# Altium PCB pressure_stm_pcb.PcbDoc
Units mm, origin at the board's own origin, x right, y up, seen from the top; angles counter-clockwise.
Board outline 28 x 28 mm, 2 copper layers (Top Layer, Bottom Layer); 28 components, 22 nets, 96 pads, 0 vias.
Unrouted connection lines stored in the file: 60.
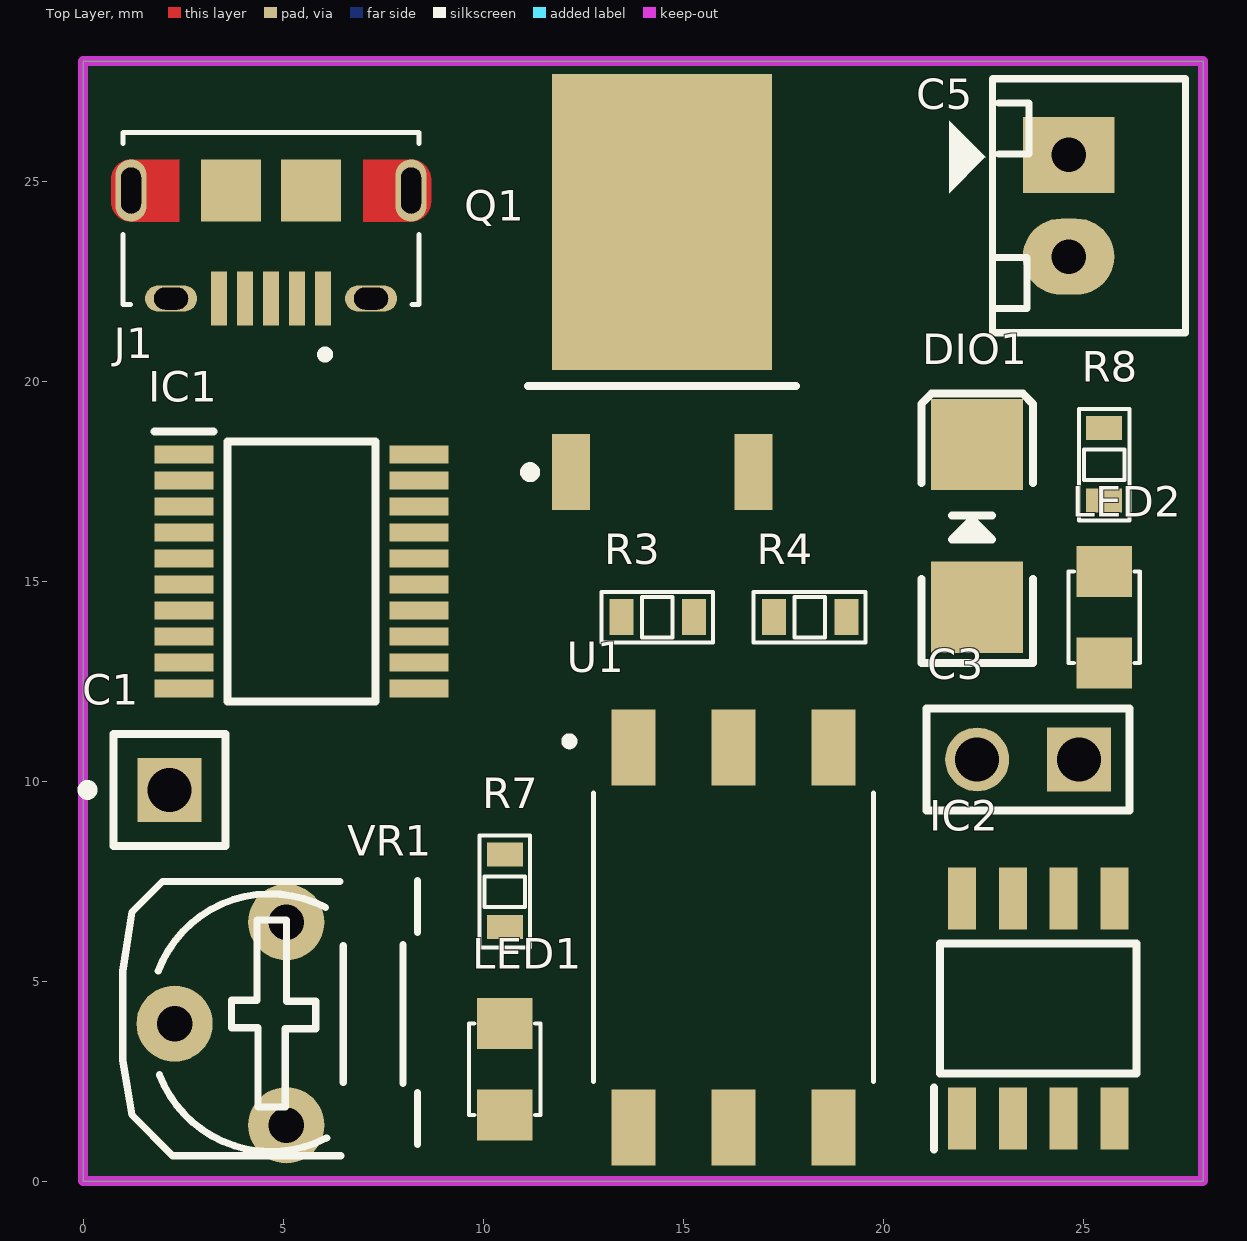
[diagram p0: Top Layer view]
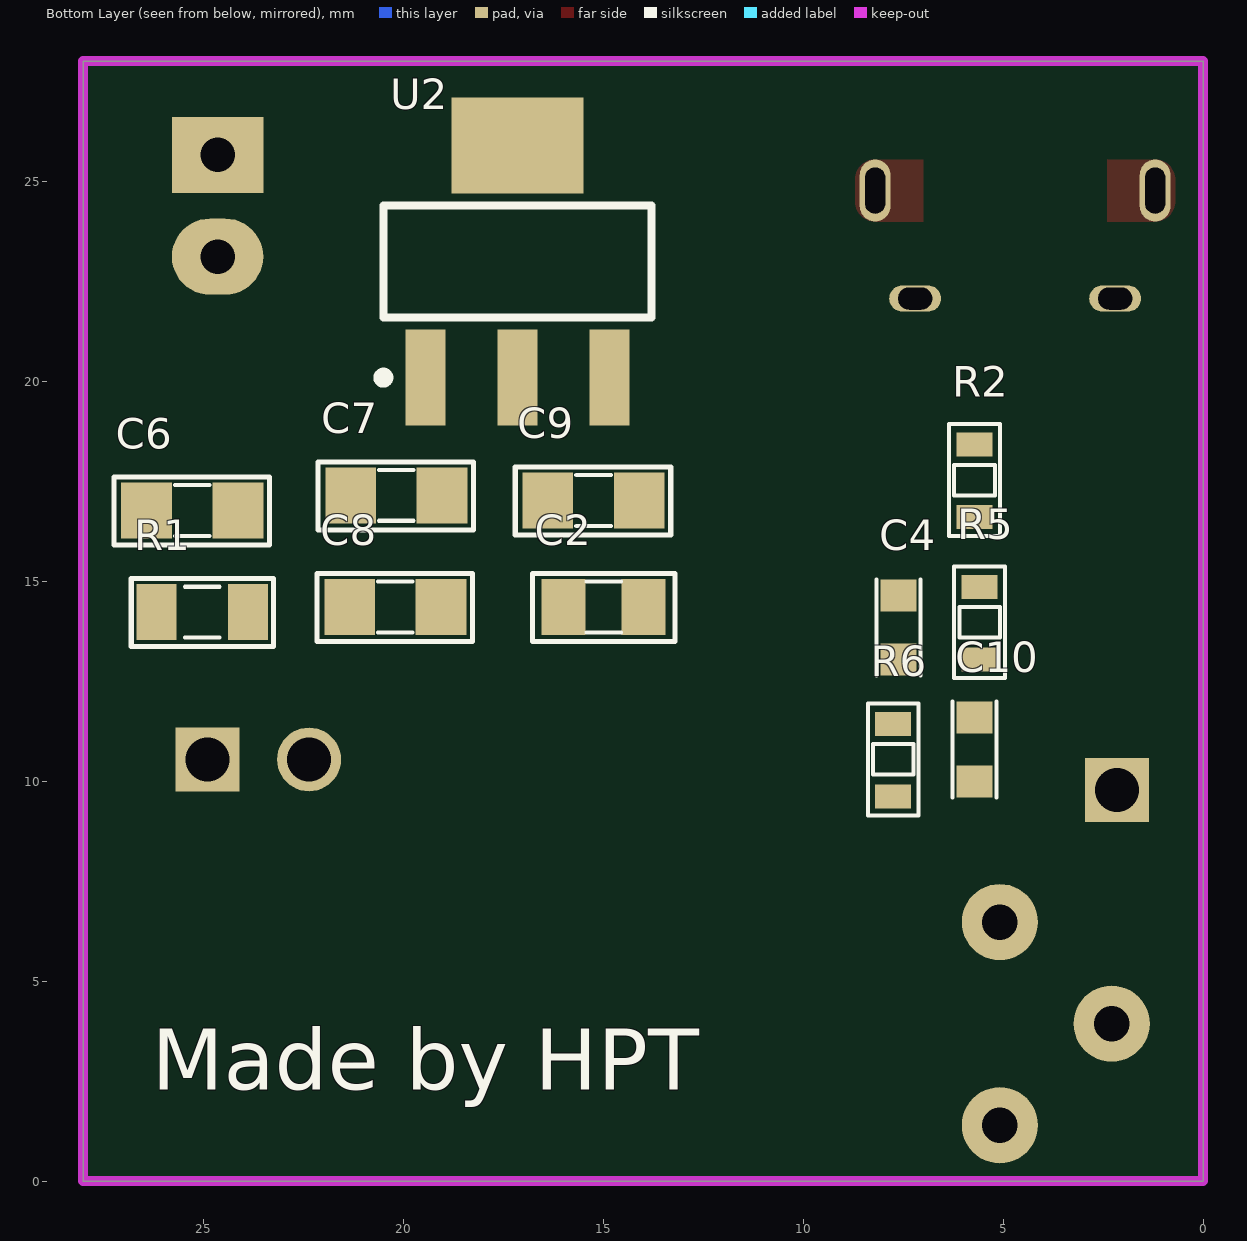
[diagram p1: Bottom Layer view, seen from below]

## Layer stack, top to bottom
Top Solder: solder mask 0.0102, Solder Resist, Dk 3.5
Top Layer: signal copper 0.0356
Dielectric 1: dielectric 0.32, FR-4, Dk 4.8
Bottom Layer: signal copper 0.0356
Bottom Solder: solder mask 0.0102, Solder Resist, Dk 3.5

## Board outline
0,0 28,0 28,28 0,28

## Design rules (kind name [scope] priority, off if disabled: settings)
Clearance [All] p1: gap=0.254
PolygonConnect [All] p1: connectstyle=Relief reliefconductorwidth=0.254 reliefentries=4 polygonreliefangle="90 Angle" airgapwidth=0.254
RoomDefinition pressure_stm_schematic [InComponentClass('pressure_stm_schematic')] p1: confinementstyle=ConfineIn formatcopy=TRUE lockcomponents=FALSE outline 31.75,-1.397 165.862,-1.397 165.862,13.589 31.75,13.589
RoutingVias [All] p1: holewidth=0.711 width=1.27 viastyle="Through Hole" minholewidth=0.711 minwidth=1.27 maxholewidth=0.711 maxwidth=1.27
SolderMaskExpansion [All] p1: expansion=0.102
Width [All] p1: maxlimit=0.254 minlimit=0.254 preferedwidth=0.254
30 further rules are at their usual default settings.

## Components (designator, comment, footprint, x,y, rotation, side; value= is the part's Value field where it differs from the comment)
C1 "JP1" JP1-D1T 2.159,9.779 r90 top
C2 "1uF" CN-SMD-0805 14.986,14.351 r180 bottom
C3 "JP2" JP2-D1T 24.892,10.541 r180 top
C4 "Capacitor SMD" CAP_0603 7.62,13.843 r270 bottom
C5 "Header2" Header2 24.638,25.654 r270 top
C6 "104" SM-CAP-0805 26.416,16.764 r180 bottom
C7 "104" SM-CAP-0805 21.311,17.145 r180 bottom
C8 "104" SM-CAP-0805 21.336,14.351 r180 bottom
C9 "104" SM-CAP-0805 16.383,17.018 r180 bottom
C10 "Capacitor SMD" CAP_0603 5.715,10.795 r270 bottom
DIO1 "Diode SMD" DIO-SMD-106 22.352,16.383 r270 top
IC1 "STM8S103F3P6BTR" SOP65P640X120-20N 5.461,15.24 r0 top
IC2 "TM7711" SOIC127P600X196-8N 23.876,4.318 r90 top
J1 "10118194-0001LF" AMPHENOL_10118194-0001LF 4.699,24.765 r180 top
LED1 "LED" LED-0805-Blue 10.541,1.651 r90 top
LED2 "LED" LED-0805-Blue 25.527,12.954 r90 top
Q1 "IRFR3910" TO-252AA_N 14.478,22.225 r90 top
R1 "10K" RES-SMD-0805 25.019,14.224 r180 bottom
R2 "1K" RES-SMD-0603 5.715,17.526 r270 bottom
R3 "1K" RES-SMD-0603 14.351,14.097 r0 top
R4 "10K" RES-SMD-0603 18.161,14.097 r0 top
R5 "100" RES-SMD-0603 5.588,13.97 r270 bottom
R6 "100" RES-SMD-0603 7.747,10.541 r270 bottom
R7 "1K" RES-SMD-0603 10.541,7.239 r90 top
R8 "1K" RES-SMD-0603 25.527,17.907 r90 top
U1 "MPS20N0040D-D" XDCR_ADP5241 16.256,6.096 r0 top
U2 "LM1117-5V" SOT223 17.145,22.987 r180 bottom
VR1 "10K" VR 5.08,1.397 r90 top

## Footprints (in the part's own frame and the unit in brackets; to place one, negate y for a bottom-side part, rotate by r counter-clockwise, add the part's x,y. Pads: shape width x height; smd on the part's side, far side on the other; paste and mask are expansions set on the pad)
AMPHENOL_10118194-0001LF [mm]
  rect 0.4x1.35 smd: 1(-1.3,2.7) 2(-0.65,2.7) 3(0,2.7) 4(0.65,2.7) 5(1.3,2.7)
  oval 1.3x0.65 hole 0.55 slot 0.85 at 0 deg: S1(-2.5,2.7) S2(2.5,2.7)
  oval 0.775x1.55 hole 0.5 slot 1.15 at 90 deg: S3(-3.5,0) S6(3.5,0)
  rect 1.5x1.55 smd: S4(-1,0) S5(1,0)
  Top Layer region: 193 vertices and 0 holes, not listed, extent -4,-0.775 -2.3,0.78
  Top Layer region: 193 vertices and 0 holes, not listed, extent 2.3,-0.78 4,0.775
  silkscreen extent -3.7,-1.45 3.7,4.2, body extent -3.99,-2.67 4.06,2.91, height 3.12
CAP_0603 [mm]
  rect 0.8x0.9 smd: 1(-0.8,0) 2(0.8,0)
  silkscreen extent -1.2,-0.55 1.2,0.55, body extent -0.8,-0.4 0.8,0.4, height 0.9
CN-SMD-0805 [mm]
  rect 1.1x1.397 smd: 1(-1,0) 2(1,0)
  silkscreen extent -1.78,-0.86 1.78,0.84, body extent -1,-0.62 1,0.63, height 0.8
DIO-SMD-106 [mil]
  rect 90x90.55 smd: 1(80,0) 2(-80,0)
  silkscreen extent -130,-55 135,55, body extent -99,-50 106,52, height 95
Header2 [mil] "CON2"
  rect 75x90 hole 34: 1(0,0)
  oval 75x90 hole 34: 2(100,0)
  silkscreen extent -75,-118 175,115, body extent -68,-70 168,107, height 236
JP1-D1T [mm] "1pins, 1 row, straight, gold plating"
  rect 1.6x1.6 hole 1.1: 1(0,0)
  silkscreen extent -1.4,-1.4 1.4,2.17
JP2-D1T [mm] "2 pins, 1 row, straight, gold plating"
  rect 1.6x1.6 hole 1.1: 1(0,0)
  round 1.6 hole 1.1: 2(2.54,0)
  silkscreen extent -1.27,-1.27 3.81,1.27, body extent -1.27,-1.27 3.81,1.27, height 8.54
LED-0805-Blue [mil]
  rect 50x55 smd: 1(0,0) 2(90,0)
  silkscreen extent 0,-35 90,35, body extent 5,-25 85,25, height 43
RES-SMD-0603 [mm]
  rect 0.6x0.9 smd: 1(-0.889,0) 2(0.927,0)
  silkscreen extent -1.4,-0.64 1.4,0.64, body extent -0.8,-0.4 0.8,0.4, height 0.43
RES-SMD-0805 [mil]
  rect 39.37x55 smd: 1(-45,0) 2(45,0)
  silkscreen extent -70,-34 70,33, body extent -39,-25 39,25, height 31
SM-CAP-0805 [mil]
  rect 50x55 smd: 1(0,0) 2(90,0)
  silkscreen extent -32,-34 121,33, body extent 6,-25 84,25, height 31
SOIC127P600X196-8N [mm]
  rect 1.55x0.7 smd: 1(-2.75,1.905) 2(-2.75,0.635) 3(-2.75,-0.635) 4(-2.75,-1.905) 5(2.75,-1.905) 6(2.75,-0.635) 7(2.75,0.635) 8(2.75,1.905)
  silkscreen extent -3.52,-2.46 1.63,2.61, body extent -3,-2.46 3,2.46, height 1.96
SOP65P640X120-20N [mm]
  rect 1.475x0.45 smd: 1(-2.938,2.925) 2(-2.938,2.275) 3(-2.938,1.625) 4(-2.938,0.975) 5(-2.938,0.325) 6(-2.938,-0.325) 7(-2.938,-0.975) 8(-2.938,-1.625) 9(-2.938,-2.275) 10(-2.938,-2.925) 11(2.938,-2.925) 12(2.938,-2.275) 13(2.938,-1.625) 14(2.938,-0.975) 15(2.938,-0.325) 16(2.938,0.325) 17(2.938,0.975) 18(2.938,1.625) 19(2.938,2.275) 20(2.938,2.925)
  silkscreen extent -3.67,-3.25 1.85,3.5, body extent -3.2,-3.25 3.2,3.25, height 1.2
SOT223 [mm]
  rect 1x2.4 smd: 1(-2.3,-2.9) 2(0,-2.9) 3(2.3,-2.9)
  rect 3.3x2.4 smd: 4(0,2.9)
  silkscreen extent -3.48,-3.02 3.35,1.4, body extent -3.25,-3.56 3.25,3.4, height 1.68
TO-252AA_N [mm] "D-PAK, 4-Leads, Body 6.1x6.5mm, Pitch 2.28mm, Lead Span 9.9mm, IPC Medium Density"
  rect 1.9x0.95 smd: 1(-4.5,2.28) 3(-4.5,-2.28)
  rect 7.4x5.5 smd: 4(1.75,0)
  silkscreen extent -4.62,-3.35 -2.35,3.43, body extent -2.25,-3.37 4.1,3.37, height 2.38
VR [mil] "Resistor Variable"
  round 75 hole 35: 1(0,0) 2(100,110) 3(200,0)
  silkscreen extent -30,-129 241,161, body extent -30,-135 230,140, height 177
XDCR_ADP5241 [mm]
  rect 1.1x1.9 smd: 1(-2.5,4.75) 2(0,4.75) 3(2.5,4.75) 4(2.5,-4.75) 5(0,-4.75) 6(-2.5,-4.75)
  silkscreen extent -4.2,-3.6 3.5,5, body extent -3.5,-5 3.5,5, height 6.8

## Part data
C1 C3: "WR-PHD 2.54 mm Angled Socket Header"
C2 C6 C7 C8 C9: library part CN
C5: "Header IDC, 2 x 1 Pin Vertical 2.54mm Pitch (Non-Boxed, Male)"
DIO1: "Default Diode"
IC1 IC2: "Integrated Circuit"
J1: "USB - micro B USB 2.0 Receptacle Connector 5 Position Surface Mount, Right Angle; Through Hole"
LED1 LED2: library part "LED SMD"
Q1: "HEXFET Power MOSFET"
R1 R2 R3 R4 R5 R6 R7 R8: library part Res-SMD, "Resistor"
U1: "Pressure Sensor 14.5PSI (100kPa) Vented Gauge Male - 0.12 (3mm) Tube 0 V ~ 4.5 V 6-SMD Module"
U2: library part LM1117, "800mA Low-Dropout Linear Regulator"
VR1: library part VR, "Var Resistor"

## Nets (pads, with @x,y where several pads share a name; then routed paths per layer and width w, separated by ;. In a path a pad name is that pad's centre, name@x,y a point inside that pad or via, vN(x,y) a via of type N, cw(c..) or ccw(c..) an arc to the next point about the centre after c; other vN are vias at no path point)
3.3V: IC1.9
5V: C4.2 C8.2 C9.2 IC2.1 IC2.7 IC2.8 J1.1 LED1.1 LED2.1 R2.2 U1.5 U2.2
12V: C3.1 C5.2 C6.2 C7.2 DIO1.2 U2.3
DOUT: IC1.20 IC2.6 R8.2
DSCK: IC1.14 IC2.5
GND: C2.2 C4.1 C5.1 C6.1 C7.1 C8.1 C9.1 DIO1.1 IC1.7 IC2.2 J1.5 J1.S1 J1.S2 J1.S3 J1.S4 J1.S5 J1.S6 Q1.3 R4.2 R7.2 U1.2 U2.1 VR1.1
MOSFET: IC1.17
MOTOR: R3.1 R4.1
NetC1_1: C1.1 IC1.2
NetC2_1: C2.1 IC1.8
NetC3_2: C3.2 Q1.4
NetC10_1: C10.1 IC2.4 R6.2
NetC10_2: C10.2 IC2.3 R5.2
NetLED1_2: LED1.2 R7.1
NetLED2_2: LED2.2 R8.1
NetQ1_1: Q1.1 R3.2
NetR2_1: R2.1 VR1.3
NetR5_1: R5.1 U1.1 U1.6
NetR6_1: R6.1 U1.3
NRST: IC1.4 J1.3 R1.2
SWIM: IC1.18 J1.2
VR: IC1.19 VR1.2
pads on no net: IC1.1 IC1.3 IC1.5 IC1.6 IC1.10 IC1.11 IC1.12 IC1.13 IC1.15 IC1.16 J1.4 R1.1 U1.4 U2.4

## Keep-outs
Keep-Out Layer:
  the board outline again, w0.254

## Silkscreen, mask and mechanical layers (free items; w line width, h text height)
Bottom Overlay:
  text "Made by HPT" at 26.289,2.286 h1.52

## Dimensions
0,28 to 0,0 on Top Overlay
0,28 to 28,28 on Top Overlay

## Text inside footprints (layer, text, board x,y; h text height)
J1: Mechanical 13 "PCB END" at 6.649,26.865 h0.5 r180